# EAGLE board JKW_standalone (EAGLE 6.4), part 1 of 2
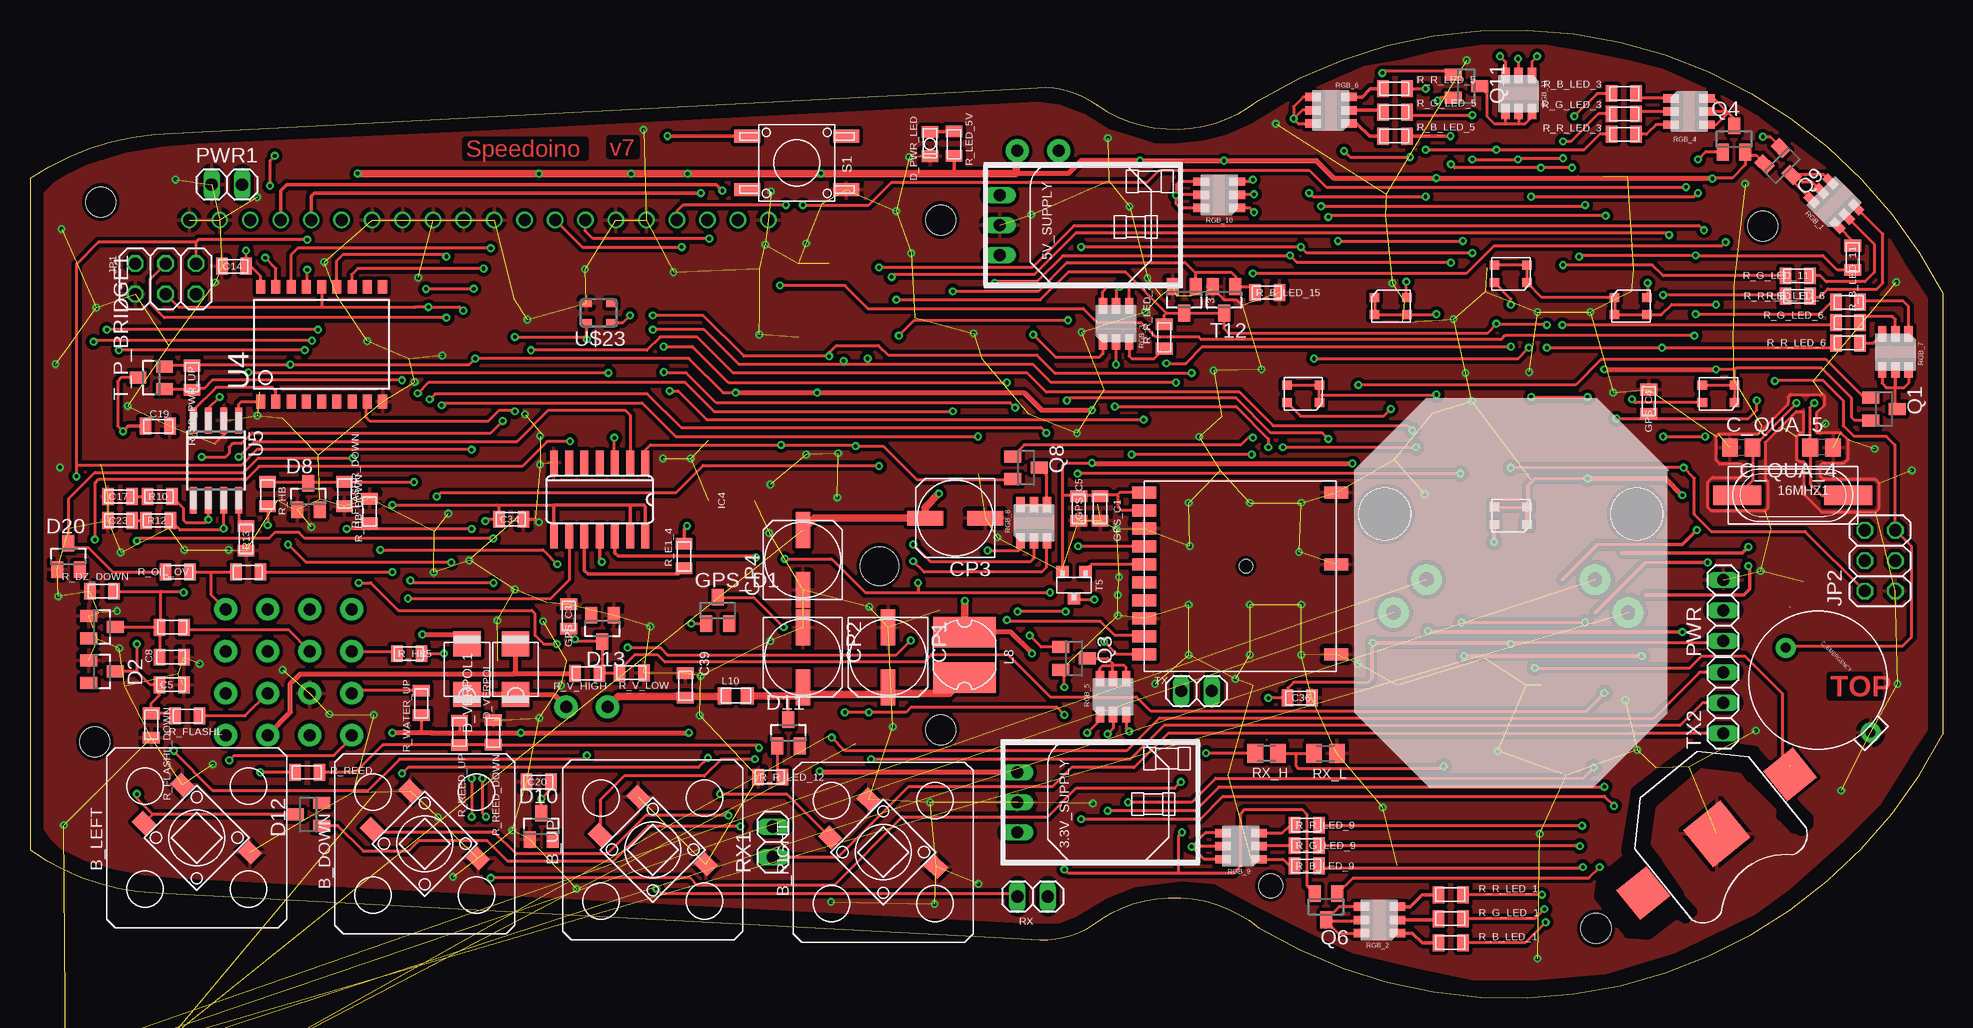
[diagram p0: board, top side]
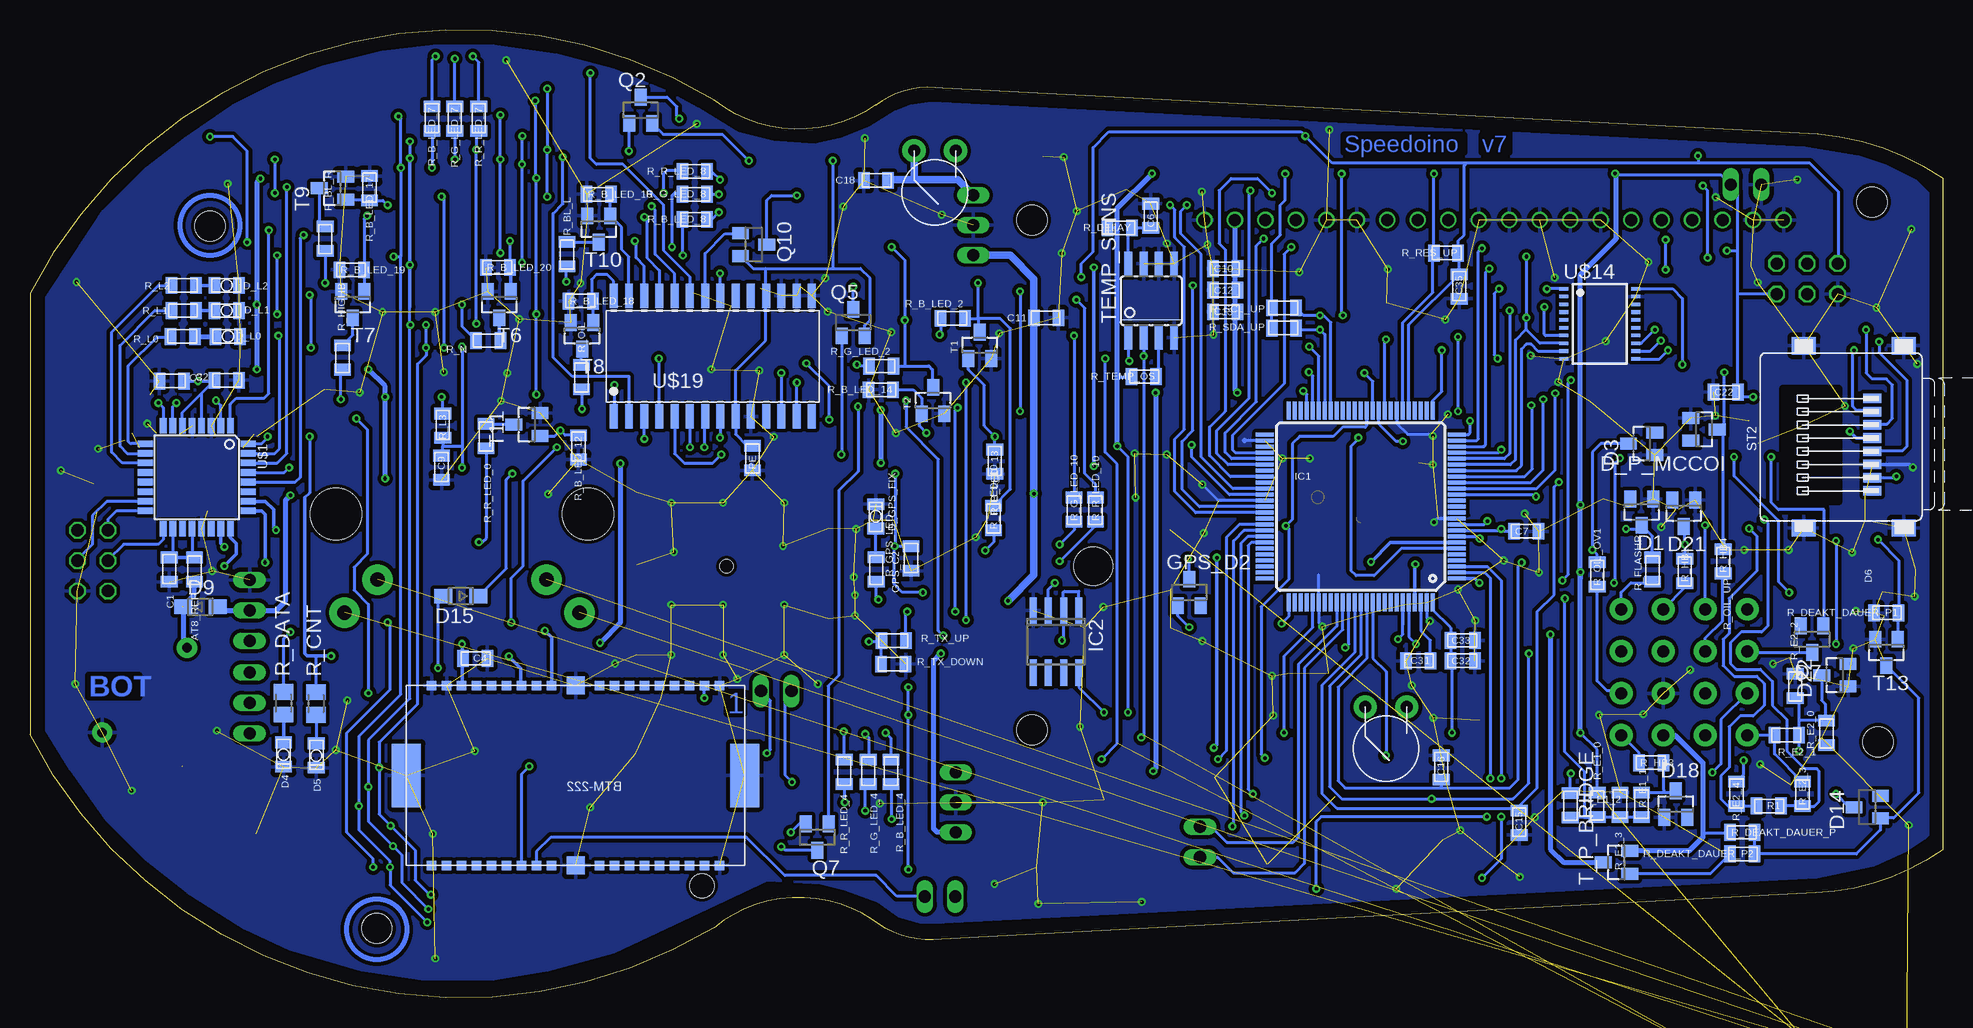
[diagram p1: board, bottom side, seen from below]

Size 159.4 x 80.69 mm. Coordinates in mm from the lower left corner, seen from the top.
Outline: 10.4,71.98 83.35,75.83
Outline: 10.41,71.98 arc29 0,68.34 0,12.34 arc33 10.6,8.74
Outline: 10.59,8.74 83.46,4.88
Outline: 83.32,75.82 arc-45 88.97,74.39
Outline: 88.91,74.44 arc73 102.4,74.84 arc-94 159.4,58.74 159.4,21.94 arc-94 102.4,5.84 arc73 89.17,6.5
Outline: 83.45,4.87 arc45 89.18,6.51
Copper layers (1*16): Top 0.035mm / dielectric 1.5mm / Bottom 0.035mm
Design rules "default": minimum track width 0.18mm, minimum drill 0.3mm, track to track 0.15mm, track to pad 0.15mm, pad to pad 0.15mm, via to via 0.15mm, smd to smd 0mil, copper to edge 0.1981mm, drill to drill 0.1981mm, minimum pad ring 0.18mm, minimum via ring 0.18mm, stop-mask expansion 0mil, vias tented up to drill 25mil, thermal gap 15mil
Net classes: 0 default: width 0.18 mm, drill 0.3 mm, clearance 0.15 mm
Holes 2.5 mm at 5.4,21.34 5.9,66.34 130.5,5.78 144.4,64.34
Holes 2 mm at 103.4,9.34
Holes 3.2 mm at 70.8,35.99
tKeepout: area 69.1,34.3 to 72.5,37.7; area 1.9,17.8 to 8.9,24.8; area 3.4,63.9 to 8.4,68.9
bKeepout: area 69.1,34.3 to 72.5,37.7
tRestrict: area 146,14 to 148.1,16; area 136.8,6.7 to 138.4,8.4; area 143.8,15.9 to 146.1,18.6; area 130.8,5.3 to 137.1,11.8; area 133,10.9 to 144.7,21.2; area 134.5,8.2 to 137.4,11.3

## Footprints (pad centres in the part's own frame; a part is rotated, then mirrored left to right if it is on the bottom)
OKI-78SR = drill 1 long: GND 0,-6.95; IN 2.5,-6.95; OUT -2.5,-6.95
POLY_FUSE = drill 1 pad 1.93: P$1 -1.73,0; P$2 1.73,0
XT-HC49S-SMD = smd 4 x 1.6: 1 -4.617,0; 2 4.617,0
0805 = smd 0.965 x 1.397: 1 -1.016,0; 2 1.016,0
SMD_DRUCKTASTER = smd 1.55 x 1.3 rotated 45: IN 1.22,4.402; IN2 -4.402,-1.22; OUT -1.22,-4.402
BTM-222 = smd 0.8 x 0.8: P$1 -12.635,-7.5; P$2 -11.385,-7.5; P$3 -10.135,-7.5; P$4 -8.885,-7.5; P$5 -7.635,-7.5; P$6 -6.385,-7.5; P$7 -5.135,-7.5; P$8 -3.885,-7.5; P$9 -2.635,-7.5; P$11 1.365,-7.5; P$12 2.615,-7.5; P$13 3.865,-7.5; P$14 5.115,-7.5; P$15 6.365,-7.5; P$16 7.615,-7.5; P$17 8.865,-7.5; P$18 10.115,-7.5; P$19 11.365,-7.5; P$20 11.365,7.5; P$21 10.115,7.5; P$22 8.865,7.5; P$23 7.615,7.5; P$24 6.365,7.5; P$25 5.115,7.5; P$26 3.865,7.5; P$27 2.615,7.5; P$28 1.365,7.5; P$30 -2.635,7.5; P$31 -3.885,7.5; P$32 -5.135,7.5; P$33 -6.385,7.5; P$34 -7.635,7.5; P$35 -8.885,7.5; P$36 -10.135,7.5; P$37 -11.385,7.5; P$38 -12.635,7.5 | smd 1.5 x 1.5: P$10 -0.635,-7.5; P$29 -0.635,7.5 | smd 2.4 x 5.3: P$AGND -14.735,0; P$BGND 13.465,0
GOLDCAP = drill 0.8 pad 1.676: MINUS -6.2,0; PLUS 3.8,0
C0805 = smd 1.3 x 1.5: 1 -0.95,0; 2 0.95,0
SMD/SMT_6.6/6.6 = smd 3 x 1.2: NEG -2.5,0; POS 2.5,0
SOT23 = smd 1 x 1.4: 1 -0.95,-1.1; 2 0.95,-1.1; 3 0,1.1
LED-0805 = smd 0.965 x 1.397: 1 -1.016,0; 2 1.016,0
SOD323-W = smd 1.5 x 1.2: A 1.45,0; C -1.45,0
PLCC-4 = smd 0.8 x 0.75: P$1 -1.35,0.725; P$2 -1.35,-0.725; P$3 1.35,-0.725; P$4 1.35,0.725
SMB = smd 2.1 x 2.3: A -2.114,0; K 2.114,0
MT3329 = smd 2 x 1: 3D-FIX -8.5,0.15; D+ -8.5,-1.35; D- -8.5,-2.85; EN -8.5,4.65; GND -8.5,3.15; GND2 -8.5,-4.35; GND_3 7.5,6.15; GND_4 7.5,0.15; GND_5 7.5,-7.35; RXD -8.5,-7.35; TXD -8.5,-5.85; VBACKUP -8.5,1.65; VCC -8.5,6.15 | hole 1.1: 0,0
BATTCON_12MM = smd 3.962 x 3.962: GND 0,0 | smd 3.175 x 3.175: PWR@1 -7.874,0; PWR@2 7.874,0
SO14 = smd 0.66 x 2.032: 1 -3.81,-3.073; 2 -2.54,-3.073; 3 -1.27,-3.073; 4 0,-3.073; 5 1.27,-3.073; 6 2.54,-3.073; 7 3.81,-3.073; 8 3.81,3.073; 9 2.54,3.073; 10 1.27,3.073; 11 0,3.073; 12 -1.27,3.073; 13 -2.54,3.073; 14 -3.81,3.073
SO08 = smd 0.6 x 2.2: 1 -1.905,-2.6; 2 -0.635,-2.6; 3 0.635,-2.6; 4 1.905,-2.6; 5 1.905,2.6; 6 0.635,2.6; 7 -0.635,2.6; 8 -1.905,2.6
SOIC20 = smd 0.66 x 2.032: 1 -5.715,-5.029; 2 -4.445,-5.029; 3 -3.175,-5.029; 4 -1.905,-5.029; 5 -0.635,-5.029; 6 0.635,-5.029; 7 1.905,-5.029; 8 3.175,-5.029; 9 4.445,-5.029; 10 5.715,-5.029; 11 5.715,5.029; 12 4.445,5.029; 13 3.175,5.029; 14 1.905,5.029; 15 0.635,5.029; 16 -0.635,5.029; 17 -1.905,5.029; 18 -3.175,5.029; 19 -4.445,5.029; 20 -5.715,5.029
TQFP100 = smd 1.5 x 0.35: 1 -8,6; 2 -8,5.5; 3 -8,5; 4 -8,4.5; 5 -8,4; 6 -8,3.5; 7 -8,3; 8 -8,2.5; 9 -8,2; 10 -8,1.5; 11 -8,1; 12 -8,0.5; 13 -8,0; 14 -8,-0.5; 15 -8,-1; 16 -8,-1.5; 17 -8,-2; 18 -8,-2.5; 19 -8,-3; 20 -8,-3.5; 21 -8,-4; 22 -8,-4.5; 23 -8,-5; 24 -8,-5.5; 25 -8,-6; 51 8,-6; 52 8,-5.5; 53 8,-5; 54 8,-4.5; 55 8,-4; 56 8,-3.5; 57 8,-3; 58 8,-2.5; 59 8,-2; 60 8,-1.5; 61 8,-1; 62 8,-0.5; 63 8,0; 64 8,0.5; 65 8,1; 66 8,1.5; 67 8,2; 68 8,2.5; 69 8,3; 70 8,3.5; 71 8,4; 72 8,4.5; 73 8,5; 74 8,5.5; 75 8,6 | smd 0.35 x 1.5: 26 -6,-8; 27 -5.5,-8; 28 -5,-8; 29 -4.5,-8; 30 -4,-8; 31 -3.5,-8; 32 -3,-8; 33 -2.5,-8; 34 -2,-8; 35 -1.5,-8; 36 -1,-8; 37 -0.5,-8; 38 0,-8; 39 0.5,-8; 40 1,-8; 41 1.5,-8; 42 2,-8; 43 2.5,-8; 44 3,-8; 45 3.5,-8; 46 4,-8; 47 4.5,-8; 48 5,-8; 49 5.5,-8; 50 6,-8; 76 6,8; 77 5.5,8; 78 5,8; 79 4.5,8; 80 4,8; 81 3.5,8; 82 3,8; 83 2.5,8; 84 2,8; 85 1.5,8; 86 1,8; 87 0.5,8; 88 0,8; 89 -0.5,8; 90 -1,8; 91 -1.5,8; 92 -2,8; 93 -2.5,8; 94 -3,8; 95 -3.5,8; 96 -4,8; 97 -4.5,8; 98 -5,8; 99 -5.5,8; 100 -6,8
2X03 = drill 1.016 octagon: 1 -2.54,-1.27; 2 -2.54,1.27; 3 0,-1.27; 4 0,1.27; 5 2.54,-1.27; 6 2.54,1.27
L-PD54 = smd 2.54 x 5.2: 1 -1.905,0; 2 1.905,0
0805+603 = smd 1.11 x 1.43: 1 -0.953,0; 2 0.953,0
NHD_2.7_SOLO_RO = drill 1: CS -102.51,24.5; DC -69.49,24.5; GND0 -61.87,24.5; GND1 -72.03,24.5; GND2 -74.57,24.5; GND3 -84.73,24.5; GND4 -87.27,24.5; GND5 -89.81,24.5; GND6 -92.35,24.5; GND7 -94.89,24.5; GND8 -107.59,24.5; GND9 -110.13,24.5; NC0 -66.95,24.5; NC1 -82.19,24.5; NC2 -97.43,24.5; NC3 -105.05,24.5; RES -99.97,24.5; SCLK -77.11,24.5; SDIN -79.65,24.5; VDD0 -64.41,24.5 | hole 2.5: -47.5,-18; -47.5,24.5
1X03 = drill 1.016 long: 1 -2.54,0; 2 0,0; 3 2.54,0
1X02 = drill 1.016 long: 1 -1.27,0; 2 1.27,0
M0805 = smd 1.3 x 1.6: 1 -0.95,0; 2 0.95,0
PLCC-6 = smd 1.3 x 0.7: 1+ 0,2.75; 1- 3,2.75; 2+ 0,1.65; 2- 3,1.65; 3+ 0,0.55; 3- 3,0.55
SW-ECO = smd 2.184 x 1.067: 1 -4.128,2.223; 2 -4.128,-2.223; 3 4.128,2.223; 4 4.128,-2.223
SPEEDOSTECKER = drill 1 pad 1.9: P$1 -2,5.5; P$2 -5.5,5.5; P$3 1.5,5.5; P$4 5,5.5; P$5 5,2; P$6 1.5,2; P$7 -2,2; P$8 -5.5,2; P$9 -5.5,-1.5; P$10 -2,-1.5; P$11 1.5,-1.5; P$12 5,-1.5; P$13 5,-5; P$14 1.5,-5; P$15 -2,-5; P$16 -5.5,-5
SD_MICRO = smd 0.8 x 1.5: 1 3.2,-9.35; 2 2.1,-9.35; 3 1,-9.35; 4 -0.1,-9.35; 5 -1.2,-9.35; 6 -2.3,-9.35; 7 -3.4,-9.35; 8 -4.5,-9.35 | smd 1.45 x 2: GND 7.6,-11.95; GND2 7.6,-3.65; GND3 -7.6,-11.95; GND4 -7.6,-3.65
STEPPER = drill 1.2 pad 2.54: 1+ 5.47,7.03; 1- 8.23,9.785; 2+ 8.23,-9.785; 2- 5.47,-7.03 | hole 4.3: 0,10.5; 0,-10.5
SOT-23 = smd 1.016 x 1.016: 1 0.953,1.111; 2 -0.952,1.111; 3 0,-1.111
SOIC8 = smd 0.66 x 2.032: 1 -1.975,-3.143; 2 -0.705,-3.143; 3 0.565,-3.143; 4 1.835,-3.143; 5 1.835,3.003; 6 0.565,3.003; 7 -0.705,3.003; 8 -1.975,3.003
SO-18W = smd 0.762 x 1.143: 1 -5.08,-4.788; 2 -3.81,-4.788; 3 -2.54,-4.788; 4 -1.27,-4.788; 5 0,-4.788; 6 1.27,-4.788; 7 2.54,-4.788; 8 3.81,-4.788; 9 5.08,-4.788; 10 5.08,4.788; 11 3.81,4.788; 12 2.54,4.788; 13 1.27,4.788; 14 0,4.788; 15 -1.27,4.788; 16 -2.54,4.788; 17 -3.81,4.788; 18 -5.08,4.788
SO-08M = smd 0.6 x 2.2: 1 -1.905,-3.33; 2 -0.635,-3.33; 3 0.635,-3.33; 4 1.905,-3.33; 5 1.905,3.33; 6 0.635,3.33; 7 -0.635,3.33; 8 -1.905,3.33
TQFP8 = smd 1.27 x 0.559: 1 -4.293,2.8; 2 -4.293,2; 3 -4.293,1.2; 4 -4.293,0.4; 5 -4.293,-0.4; 6 -4.293,-1.2; 7 -4.293,-2; 8 -4.293,-2.8; 17 4.293,-2.8; 18 4.293,-2; 19 4.293,-1.2; 20 4.293,-0.4; 21 4.293,0.4; 22 4.293,1.2; 23 4.293,2; 24 4.293,2.8 | smd 0.559 x 1.27: 9 -2.8,-4.293; 10 -2,-4.293; 11 -1.2,-4.293; 12 -0.4,-4.293; 13 0.4,-4.293; 14 1.2,-4.293; 15 2,-4.293; 16 2.8,-4.293; 25 2.8,4.293; 26 2,4.293; 27 1.2,4.293; 28 0.4,4.293; 29 -0.4,4.293; 30 -1.2,4.293; 31 -2,4.293; 32 -2.8,4.293
TSSOP20 = smd 0.3 x 0.75: 1 -2.925,-3; 2 -2.275,-3; 3 -1.625,-3; 4 -0.975,-3; 5 -0.325,-3; 6 0.325,-3; 7 0.975,-3; 8 1.625,-3; 9 2.275,-3; 10 2.925,-3; 11 2.925,3; 12 2.275,3; 13 1.625,3; 14 0.975,3; 15 0.325,3; 16 -0.325,3; 17 -0.975,3; 18 -1.625,3; 19 -2.275,3; 20 -2.925,3
SOIC28 = smd 0.66 x 2.032: 1 -8.255,-5.029; 2 -6.985,-5.029; 3 -5.715,-5.029; 4 -4.445,-5.029; 5 -3.175,-5.029; 6 -1.905,-5.029; 7 -0.635,-5.029; 8 0.635,-5.029; 9 1.905,-5.029; 10 3.175,-5.029; 11 4.445,-5.029; 12 5.715,-5.029; 13 6.985,-5.029; 14 8.255,-5.029; 15 8.255,5.029; 16 6.985,5.029; 17 5.715,5.029; 18 4.445,5.029; 19 3.175,5.029; 20 1.905,5.029; 21 0.635,5.029; 22 -0.635,5.029; 23 -1.905,5.029; 24 -3.175,5.029; 25 -4.445,5.029; 26 -5.715,5.029; 27 -6.985,5.029; 28 -8.255,5.029
ASE = smd 0.9 x 0.65: 1 -1.05,-0.825; 2 1.05,-0.825; 3 1.05,0.825; 4 -1.05,0.825

## Placement (x,y rotation side)
3.3V_SUPPLY  OKI78SR3.31.5WHC  [OKI-78SR]  89.2,16.29 270 top
5V_F  600mA  [POLY_FUSE]  84,70.62 180 bottom
5V_SUPPLY  OKI78SR51.5W36HC  [OKI-78SR]  87.75,64.42 270 top
12V_F1  1.1A  [POLY_FUSE]  46.4,24.24 180 bottom
16MHZ1  16Mhz  [XT-HC49S-SMD]  146.9,41.89 0 top
AT8_REF  10R  [0805]  145.7,35.69 90 bottom
B_DOWN  SMD_TASTER_MIT_KAPPE  [SMD_DRUCKTASTER]  32.9,12.84 270 top
B_LEFT  SMD_TASTER_MIT_KAPPE  [SMD_DRUCKTASTER]  13.9,13.34 270 top
B_RIGHT  SMD_TASTER_MIT_KAPPE  [SMD_DRUCKTASTER]  71.1,12.14 270 top
B_UP  SMD_TASTER_MIT_KAPPE  [SMD_DRUCKTASTER]  51.9,12.34 270 top
BLUETOOTH  BTM-222  [BTM-222]  114.57,18.53 180 bottom
C1  100nF  [0805]  147.8,35.69 270 bottom
C2  100nF  [0805]  147.6,51.42 0 bottom
C3  100nF  [0805]  143,51.48 180 bottom
C4  100nF  [0805]  122.3,28.29 180 bottom
C5  100nF  [0805]  11.8,26.09 0 top
C6  10µF  [0805]  66,65.19 90 bottom
C7  100nF  [0805]  34.7,38.89 0 bottom
C8  100nF  [0805]  11.8,28.39 0 top
C9  100nF  [0805]  125.1,44.19 270 bottom
C10  100nF  [0805]  59.8,60.79 0 bottom
C11  100n/20V  [0805]  74.72,56.69 0 bottom
C12  100nF  [0805]  59.8,58.99 0 bottom
C13  100nF  [0805]  59.8,57.19 0 bottom
C14  100n/20V  [0805]  17,60.99 0 top
C15  100nF  [0805]  35.3,14.59 270 bottom
C16  100nF  [0805]  41.8,19.19 270 bottom
C17  560p/20V  [0805]  7.5,41.79 0 top
C18  100n/20V  [0805]  88.9,68.14 180 bottom
C19  100nF  [0805]  10.64,47.66 180 top
C20  100nF  [0805]  42.4,17.99 0 top
C22  100n/20V  [0805]  18.1,50.49 0 bottom
C23  560p/20V  [0805]  7.5,39.79 0 top
C31  100nF  [0805]  43.7,28.09 180 bottom
C32  100nF  [0805]  40,28.09 0 bottom
C33  100nF  [0805]  40,29.79 0 bottom
C34  100nF  [0805]  40.1,39.89 0 top
C35  100nF  [0805]  40.3,59.29 270 bottom
C36  100nF  [0805]  105.8,24.99 180 top
C39  2µ2/100V  [0805]  54.61,26.04 90 top
C_EMERGENCY  DX-5R5H334U  [GOLDCAP]  149,26.49 135 top
C_QUA_1  Tantal 1µF  [C0805]  -1.6,-19.31 0 top  (outside the outline)
C_QUA_2  100nF  [C0805]  -1.6,-25.41 0 top  (outside the outline)
C_QUA_4  22pF  [C0805]  149.3,45.89 180 top
C_QUA_5  22pF  [C0805]  142.6,45.89 0 top
C_QUA_6  220nF  [C0805]  -1.6,-39.31 0 top  (outside the outline)
C_QUA_7  220nF  [C0805]  -1.6,-45.41 0 top  (outside the outline)
C_QUA_8  100nF  [C0805]  -1.6,-51.51 0 top  (outside the outline)
C_QUA_9  Tantal 100µF  [C0805]  -1.6,-57.61 0 top  (outside the outline)
CP1  330µF/16V  [SMD/SMT_6.6/6.6]  71.5,28.39 270 top
CP2  330µF/16V  [SMD/SMT_6.6/6.6]  64.4,28.39 270 top
CP3  330µF/16V  [SMD/SMT_6.6/6.6]  77.1,39.99 180 top
CP4  330µF/16V  [SMD/SMT_6.6/6.6]  64.4,36.49 90 top
D1  5.5V  [SOT23]  25.1,40.49 180 bottom
D2  5.5V  [SOT23]  6,27.19 270 top
D3  5.5V  [SOT23]  25.1,46.19 90 bottom
D4  Red  [LED-0805]  138.27,20.27 270 bottom
D5  Blue  [LED-0805]  135.54,20.19 270 bottom
D6  20V-Zdiode  [SOT23]  6,30.9 270 top
D7  771-PMBD7000235  [SOT23]  10.9,29.89 180 bottom
D8  5.5V  [SOT23]  23.2,41.79 0 top
D9  Mouser 726-BAT60AE6327  [SOD323-W]  145.2,32.59 0 bottom
D10  5.5V  [SOT23]  42.6,14.29 0 top
D11  20V-Zdiode  [SOT23]  63.2,22.09 0 top
D12  771-PMBD7000235  [SOT23]  23.2,15.29 90 top
D13  5.5V  [SOT23]  47.7,30.79 180 top
D14  771-PMBD7000235  [SOT23]  6.3,15.89 90 bottom
D15  Mouser 726-BAT60AE6327  [SOD323-W]  123.5,33.49 180 bottom
D18  78-MMBZ5232B-V  [SOT23]  22.25,16.14 0 bottom
D20  5.5V  [SOT23]  3.2,36.79 0 top
D21  5.5V  [SOT23]  21.6,40.39 180 bottom
D22  5.5V  [SOT23]  9,26.89 90 bottom
D_GPS_FIX  Red  [LED-0805]  88.92,40.14 90 bottom
D_GR_BLR  PLCC4_LED  [PLCC-4]  133.4,57.66 0 top
D_GR_N  PLCC4_LED  [PLCC-4]  123.4,60.34 180 top
D_L0  [LED-0805]  142.91,55.13 0 bottom
D_L1  [LED-0805]  143,57.29 0 bottom
D_L2  [LED-0805]  143,59.39 0 bottom
D_P_MCCOI  78-MMBZ5232B-V  [SOT23]  19.9,47.39 270 bottom
D_PWR_LED  Red  [LED-0805]  75,71.18 270 top
D_VERPOL  SS24T3G  [SMB]  40.45,27.39 270 top
D_VERPOL1  SS24T3G  [SMB]  36.4,27.39 270 top
GPS  MT3329  [MT3329]  101.35,35.99 0 top
GPS_BAT  F_908642  [BATTCON_12MM]  140.56,13.67 219 top
GPS_C1  100nF  [0805]  89.17,40.79 90 top
GPS_C2  100nF  [0805]  85.97,36.62 270 bottom
GPS_C3  100nF  [0805]  44.9,31.79 270 top
GPS_C4  100nF  [0805]  134.9,49.69 270 top
GPS_C5  100nF  [0805]  87.4,40.79 90 top
GPS_D1  771-BAV23C,215  [SOT23]  57.3,32.29 0 top
GPS_D2  771-BAV23C,215  [SOT23]  62.8,33.79 0 bottom
IC1  4093D  [SO14]  47.47,41.54 180 top
IC2  LM1458D  [SO08]  73.9,29.69 180 bottom
IC3  TMC222  [SOIC20]  4.9,-10.21 0 top  (outside the outline)
IC4  ATMEGA2560-16AU  [TQFP100]  48.5,40.95 180 bottom
JP1  ICSP  [2X03]  11.3,59.94 0 top
JP2  ICSP  [2X03]  154.18,36.44 90 top
L8  22µH 1A  [L-PD54]  77.88,28.59 90 top
L10  BLM21PG221SN1  [0805+603]  58.82,25.17 0 top
NHD_2.7  NHD_2.7_SOLO_RO  [NHD_2.7_SOLO_RO]  123.4,40.34 0 top
PE  100nF  [0805]  99.2,44.99 90 bottom
PWR  [1X03]  141.1,32.29 90 top
PWR1  [1X02]  16.4,67.79 0 top
Q1  BSS84  [SOT23]  154.5,49.09 270 top
Q2  BSS84  [SOT23]  108.5,73.99 0 bottom
Q3  BSS84  [SOT23]  87,28.29 270 top
Q4  BSS84  [SOT23]  142,71.59 0 top
Q5  BSS84  [SOT23]  90.8,56.29 0 bottom
Q6  BSS84  [SOT23]  108,7.59 180 top
Q7  BSS84  [SOT23]  93.8,13.39 180 bottom
Q8  BSS84  [SOT23]  83,44.19 270 top
Q9  BSS84  [SOT23]  146,69.39 225 top
Q10  BSS84  [SOT23]  99.1,62.79 270 bottom
Q11  BSS84  [SOT23]  119.7,75.99 270 top
R1  160  [0805]  14.5,15.99 180 bottom
R10  100  [0805]  10.8,41.79 0 top
R12  100  [0805]  10.7,39.79 0 top
R13  4.7k  [0805]  18,38.29 90 top
R_B_LED_1  80R  [0805]  118.4,4.59 0 top
R_B_LED_2  80R  [0805]  82.5,56.64 0 bottom
R_B_LED_3  80R  [0805]  132.8,75.39 180 top
R_B_LED_4  80R  [0805]  87.65,18.84 270 bottom
R_B_LED_5  80R  [0805]  113.75,71.84 0 top
R_B_LED_6  80R  [0805]  151.5,57.99 180 top
R_B_LED_7  80R  [0805]  125.9,73.29 270 bottom
R_B_LED_8  80R  [0805]  104,64.89 180 bottom
R_B_LED_9  80R  [0805]  106.4,10.99 0 top
R_B_LED_10  80R  [0805]  79.1,39.99 90 bottom
R_B_LED_11  80R  [0805]  151.9,61.69 270 top
R_B_LED_12  10k  [0805]  113.7,45.89 270 bottom
R_B_LED_13  10k  [0805]  79,44.69 270 bottom
R_B_LED_14  10k  [0805]  88.5,50.69 180 bottom
R_B_LED_15  10k  [0805]  103.1,58.79 0 top
R_B_LED_16  10k  [0805]  112,66.99 0 bottom
R_B_LED_17  10k  [0805]  131.1,67.49 270 bottom
R_B_LED_18  10k  [0805]  113.5,58.09 0 bottom
R_B_LED_19  10k  [0805]  132.6,60.69 0 bottom
R_B_LED_20  10k  [0805]  120.4,60.89 0 bottom
R_BL_L  33R  [0805]  114.65,61.99 90 bottom
R_BL_R  33R  [0805]  134.8,63.29 90 bottom
R_CNT  220R  [M0805]  135.56,24.53 90 bottom
R_DATA  220R  [M0805]  138.27,24.55 90 bottom
R_DEAKT_DAUER_P  10k  [0805]  16.7,13.79 0 bottom
R_DEAKT_DAUER_P1  10k  [0805]  4.7,32.09 180 bottom
R_DEAKT_DAUER_P2  5k  [0805]  16.7,11.99 180 bottom
R_DELAY  300R  [0805]  68.6,64.19 180 bottom
R_DZ  5k  [0805]  11.81,30.88 180 top
R_DZ_DOWN  3k3  [0805]  6,33.89 180 top
R_E1_0  n.b.  [0805]  28.8,16.09 90 bottom
R_E1_1  n.b. / 0R  [0805]  25.1,16.09 270 bottom
R_E1_2  n.b.  [0805]  31.04,16.04 90 bottom
R_E1_3  n.b. / 0R  [0805]  26.9,16.09 270 bottom
R_E1_4  n.b.  [0805]  54.5,36.84 90 top
R_E2_0  n.b.  [0805]  9.7,22.09 90 bottom
R_E2_1  n.b. / 0R  [0805]  13,21.89 0 bottom
R_E2_2  n.b.  [0805]  12.3,25.99 90 bottom
R_E2_3  0R / n.b.  [0805]  11.7,16.99 90 bottom
R_E2_4  0R / n.b.  [0805]  17.2,16.99 270 bottom
R_FLASHL  10k  [0805]  13.1,23.49 180 top
R_FLASHL_DOWN  5k  [0805]  10.1,22.69 270 top
R_FLASHR  10k  [0805]  24.2,35.69 90 bottom
R_FLASHR_DOWN  5k  [0805]  28.3,40.59 90 top
R_G_LED_1  110R  [0805]  118.4,6.59 0 top
R_G_LED_2  110R  [0805]  88.47,52.67 0 bottom
R_G_LED_3  110R  [0805]  132.8,73.69 180 top
R_G_LED_4  110R  [0805]  89.55,18.84 270 bottom
R_G_LED_5  110R  [0805]  113.75,73.84 0 top
R_G_LED_6  110R  [0805]  151.5,56.29 180 top
R_G_LED_7  110R  [0805]  124,73.29 270 bottom
R_G_LED_8  110R  [0805]  104,66.99 180 bottom
R_G_LED_9  110R  [0805]  106.4,12.69 0 top
R_G_LED_10  110R  [0805]  72.4,40.69 90 bottom
R_G_LED_11  110R  [0805]  147.3,60.19 180 top
R_GPS_LED  1k  [0805]  88.88,35.72 90 bottom
R_GR_BL_L  PLCC4_LED  [PLCC-4]  113.4,57.66 0 top
R_HB  10k  [0805]  19.8,41.99 90 top
R_HB1  600R  [0805]  21.5,35.59 90 bottom
R_HB3  600R  [0805]  24.3,19.59 0 bottom
R_HB4  600R  [0805]  18.3,36.39 90 bottom
R_HB5  600R  [0805]  31.6,28.69 0 top
R_HB_DOWN  5k  [0805]  26.2,41.99 270 top
R_HIGHB  46R  [0805]  133.35,53.39 90 bottom
R_L0  1k  [0805]  146.67,55.13 0 bottom
R_L1  1k  [0805]  146.6,57.29 0 bottom
R_L2  1k  [0805]  146.6,59.39 0 bottom
R_L3  10k  [0805]  125,47.69 270 bottom
R_LED_5V  2k  [0805]  77,71.22 90 top
R_N  33R  [0805]  121.2,54.79 0 bottom
R_OIL  52R  [0805]  113.45,51.74 90 bottom
R_OIL_OV  1k  [0805]  12.3,35.49 180 top
R_OIL_OV1  1k  [0805]  28.8,35.29 90 bottom
R_OIL_UP  220R  [0805]  18.2,35.49 0 top
R_R_LED_0  52R  [0805]  121.4,46.84 90 bottom
R_R_LED_1  92R  [0805]  118.4,8.59 0 top
R_R_LED_2  92R  [0805]  94.53,55.14 90 top
R_R_LED_3  92R  [0805]  132.8,71.99 180 top
R_R_LED_4  92R  [0805]  91.55,18.84 270 bottom
R_R_LED_5  92R  [0805]  113.75,75.79 0 top
R_R_LED_6  92R  [0805]  151.5,54.59 180 top
R_R_LED_7  92R  [0805]  122,73.29 270 bottom
R_R_LED_8  92R  [0805]  104,68.89 180 bottom
R_R_LED_9  92R  [0805]  106.4,14.39 0 top
R_R_LED_10  92R  [0805]  70.6,40.69 90 bottom
R_R_LED_11  92R  [0805]  147.3,58.49 180 top
R_R_LED_12  220R  [0805]  61.7,18.39 0 top
R_REED  7k  [0805]  23.1,18.79 0 top
R_REED_DOWN  5k / n.b. (12V Signal / 5V Signal)  [0805]  38.6,22.12 90 top
R_REED_UP  n.b.(Honda Signal) / 15k (Reed)  [0805]  35.8,22.09 270 top
R_RES_UP  10k  [0805]  41.4,62.09 180 bottom
R_SCL_UP  1k  [0805]  54.9,57.52 0 bottom
R_SD_PWR_UP  10k  [0805]  13.5,51.69 270 top
R_SDA_UP  1k  [0805]  54.9,55.84 0 bottom
R_TEMP_OS  10K  [0805]  66.6,51.79 180 bottom
R_TX_DOWN  2k7  [0805]  87.45,27.82 0 bottom
R_TX_UP  1k2  [0805]  87.42,29.77 0 bottom
R_V_HIGH  2k2  [0805]  46.45,27.04 0 top
R_V_LOW  1k  [0805]  50.15,27.09 0 top
R_WATER_UP  390R  [0805]  32.6,24.59 90 top
RGB_1  RGB_LED  [PLCC-6]  148.1,66.09 315 top
RGB_2  RGB_LED  [PLCC-6]  110.95,4.84 0 top
RGB_3  RGB_LED  [PLCC-6]  88.85,57.69 270 top
RGB_4  RGB_LED  [PLCC-6]  139.75,75.54 180 top
RGB_5  RGB_LED  [PLCC-6]  88.6,26.59 270 top
RGB_6  RGB_LED  [PLCC-6]  106.9,72.34 0 top
RGB_7  RGB_LED  [PLCC-6]  157.1,52.34 90 top
RGB_8  RGB_LED  [PLCC-6]  82,41.09 270 top
RGB_9  RGB_LED  [PLCC-6]  99.4,10.99 0 top
RGB_10  RGB_LED  [PLCC-6]  97.6,65.29 0 top
RGB_11  RGB_LED  [PLCC-6]  125.7,73.89 90 top
RX  [1X02]  83.56,8.44 0 top
RX1  [1X02]  61.9,12.99 90 top
RX_H  1k2  [M0805]  103.06,20.38 0 top
RX_L  2k7  [M0805]  107.95,20.38 180 top
S1  [SW-ECO]  63.91,69.6 180 top
SPEEDOSTECKER  SPEEDOSTECKER  [SPEEDOSTECKER]  21.8,26.89 0 top
ST2  SD_MICRO  [SD_MICRO]  15.22,46.76 90 bottom
STEPPER  STEPPER  [STEPPER]  123.4,40.34 270 top
T1  Mouser: 771-2N7002BK215 , N-Channel, 60V 350mA, SOT-23, 0,052€  [SOT23]  80.25,54.39 0 bottom
T2  Mouser: 771-2N7002BK215 , N-Channel, 60V 350mA, SOT-23, 0,052€  [SOT23]  84.15,49.79 0 bottom
T3  Mouser: 771-2N7002BK215 , N-Channel, 60V 350mA, SOT-23, 0,052€  [SOT23]  96.17,58.19 180 top
T5  Mouser: 771-2N7002BK215 , N-Channel, 60V 350mA, SOT-23, 0,052€  [SOT-23]  87,34.39 0 top
T6  Mouser: 771-2N7002BK215 , N-Channel, 60V 350mA, SOT-23, 0,052€  [SOT23]  120.3,57.79 180 bottom
T7  Mouser: 771-2N7002BK215 , N-Channel, 60V 350mA, SOT-23, 0,052€  [SOT23]  132.5,57.79 180 bottom
T8  Mouser: 771-2N7002BK215 , N-Channel, 60V 350mA, SOT-23, 0,052€  [SOT23]  113.4,55.19 180 bottom
T9  Mouser: 771-2N7002BK215 , N-Channel, 60V 350mA, SOT-23, 0,052€  [SOT23]  134.2,67.49 90 bottom
T10  Mouser: 771-2N7002BK215 , N-Channel, 60V 350mA, SOT-23, 0,052€  [SOT23]  112,64.09 180 bottom
T11  Mouser: 771-2N7002BK215 , N-Channel, 60V 350mA, SOT-23, 0,052€  [SOT23]  118,47.79 90 bottom
T12  Mouser: 771-2N7002BK215 , N-Channel, 60V 350mA, SOT-23, 0,052€  [SOT23]  99.5,58.19 180 top
T13  Mouser: 771-2N7002BK215 , N-Channel, 60V 350mA, SOT-23, 0,052€  [SOT23]  4.7,28.79 180 bottom
T_P_BRIDGE  PMV160UP215  [SOT23]  27.2,11.29 90 bottom
T_P_BRIDGE1  PMV160UP215  [SOT23]  10.1,51.69 90 top
TEMP_SENS  SE95D  [SOIC8]  65.9,58.19 0 bottom
TX  [1X02]  97.22,25.57 180 top
TX2  [1X03]  141.1,24.59 90 top
U4  MCP2515  [SO-18W]  24.3,54.49 0 top
U5  MCP2551  [SO-08M]  15.5,44.79 180 top
U$1  ATMEGA328P-AU  [TQFP8]  145.5,43.39 270 bottom
U$3  CLM4B-BKW-CTBVA363  [PLCC-4]  140.7,50.34 180 top
U$11  CLM4B-RKW-CWAXBAA3  [PLCC-4]  106.1,50.34 180 top
U$14  74LVC_LVCH245A  [TSSOP20]  28.6,56.19 270 bottom
U$19  MCP23017  [SOIC28]  102.5,53.49 0 bottom
U$22  CLM4B-RKW-CWAXBAA3  [PLCC-4]  123.4,40.19 180 top
U$23  ASE  [ASE]  47.4,57.09 180 top

## Library data of the parts
3.3V_SUPPLY 5V_F 5V_SUPPLY 12V_F1 B_DOWN B_LEFT B_RIGHT B_UP C_EMERGENCY CP1-CP4 D_GR_BLR D_GR_N GPS NHD_2.7 R_GR_BL_L RGB_1-RGB_11 SPEEDOSTECKER ST2 STEPPER T1-T3 T6-T13 T_P_BRIDGE T_P_BRIDGE1 TEMP_SENS U$1 U$3 U$11 U$14 U$19 U$22 = Kolja
16MHZ1 = XT
AT8_REF C1-C20 C22 C23 C31-C36 C39 D_VERPOL D_VERPOL1 GPS_C1-GPS_C5 L8 L10 PE R1 R10 R12 R13 R_B_LED_1-R_B_LED_20 R_BL_L R_BL_R R_DEAKT_DAUER_P R_DEAKT_DAUER_P1 R_DEAKT_DAUER_P2 R_DELAY R_DZ R_DZ_DOWN R_E1_0 R_E1_1-R_E1_4 R_E2_0 R_E2_1-R_E2_4 R_FLASHL R_FLASHL_DOWN R_FLASHR R_FLASHR_DOWN R_G_LED_1-R_G_LED_11 R_GPS_LED R_HB R_HB1 R_HB3-R_HB5 R_HB_DOWN R_HIGHB R_L0 R_L1-R_L3 R_LED_5V R_N R_OIL R_OIL_OV R_OIL_OV1 R_OIL_UP R_R_LED_0 R_R_LED_1-R_R_LED_12 R_REED R_REED_DOWN R_REED_UP R_RES_UP R_SCL_UP R_SD_PWR_UP R_SDA_UP R_TEMP_OS R_TX_DOWN R_TX_UP R_V_HIGH R_V_LOW R_WATER_UP T5 = RCLDT
BLUETOOTH = btm-222
C_QUA_1 C_QUA_2 C_QUA_4-C_QUA_9 R_CNT R_DATA = rcl
D1-D3 D6 D8-D11 D13 D15 D18 D20-D22 D_P_MCCOI = diode
D4 D5 D_GPS_FIX D_L0 D_L1 D_L2 D_PWR_LED = OPTO
D7 D12 D14 GPS_D1 GPS_D2 = semicon-smd-ipc
GPS_BAT = SparkFun
IC1 = 40xx
IC2 = linear
IC3 = tmc
IC4 = atmel-2005
JP1 JP2 PWR PWR1 RX RX1 TX TX2 = pinhead
Q1-Q11 = transistor-small-signal
RX_H RX_L = resistor
S1 = SWITCH+RELAIS
U4 = microchip_can
U5 = skpang_lib
U$23 = crystal; OC_FARNELL: unknown; OC_NEWARK: unknown

## Nets
3D-FIX: GPS.3D-FIX T5.1
12V: D_VERPOL.A R_V_HIGH.1 SPEEDOSTECKER.P$15
12V_D_SAFE: 12V_F1.P$1 D_VERPOL1.K D_VERPOL.K
12V_PERMANENT: R_DEAKT_DAUER_P.1 SPEEDOSTECKER.P$14 T_P_BRIDGE.2
12V_SAFE: 12V_F1.P$2 C39.1 L10.1
16MHZ: IC4.34 U4.8 U$23.3
+3V3_EXT: 3.3V_SUPPLY.OUT BLUETOOTH.P$2 BLUETOOTH.P$17 C4.2 C10.2 C12.2 C13.2 C36.2 GPS.EN GPS.VCC GPS_C1.2 GPS_C5.2 NHD_2.7.VDD0 PWR.1 R_SD_PWR_UP.1 T5.2 T_P_BRIDGE1.2 U$14.1 U$14.20
+3V3_EXT_S: C19.2 ST2.4 T_P_BRIDGE1.3
A0: D3.3 IC4.97 R_OIL_OV1.2
A1: D20.3 IC4.96 R_OIL_OV.2
A2: D13.3 GPS_C3.2 GPS_C4.2 IC4.95 R_V_HIGH.2 R_V_LOW.1 U$1.2
A3: IC4.94
A4: IC4.93
A5: IC4.92
A6: IC4.91
A7: D22.3 IC4.90 R_E2_0.2 R_E2_1.2 R_E2_2.1
A11: IC2.1 IC2.2 IC4.86
A12: IC4.85 RX1.1 TX2.1
A13: IC4.84 RX1.2
A14: IC4.83
A15: IC4.82
ANT: BLUETOOTH.P$37
ARD_RES_OUT: C35.1 IC4.30 JP1.2 R_RES_UP.1 S1.4 U4.17 U$1.28
ARD_RX_5: RX_H.1 TX.1
ARD_RX_33: BLUETOOTH.P$26 RX_H.2 RX_L.2
B_DOWN: B_DOWN.OUT IC4.68
B_LEFT: B_LEFT.OUT D12.3 D14.3
B_RIGHT: B_RIGHT.OUT IC4.69
B_UP: B_UP.OUT IC4.66
BAT+: 3.3V_SUPPLY.IN 5V_SUPPLY.IN C11.1 C_QUA_7.1 C_QUA_8.1 C_QUA_9.1 CP3.POS CP4.POS IC3.12 IC3.19 L8.2
BL_L_IN: C5.1 D2.3 IC4.8 R_FLASHL.2 R_FLASHL_DOWN.1
BL_L_IN_H: R_FLASHL.1 SPEEDOSTECKER.P$10
BL_R_IN: C7.1 D1.3 IC4.9 R_FLASHR.2 R_FLASHR_DOWN.1
BL_R_IN_H: R_FLASHR.1 SPEEDOSTECKER.P$4
BLUE_INSTR: R_B_LED_1.2 R_B_LED_2.2 R_B_LED_3.2 R_B_LED_4.2 R_B_LED_5.2 R_B_LED_6.2 R_B_LED_7.2 R_B_LED_8.2 R_B_LED_9.2 R_B_LED_10.2 R_B_LED_11.2 T1.3
CAN_RXD: U4.2 U5.4
CAN_TXD: U4.1 U5.1
CANH: R1.2 R12.2 R_E2_4.2 U5.7
CANL: R1.1 R10.2 R_E2_3.1 U5.6
CONNECT: BLUETOOTH.P$13 R_CNT.2 U$1.32
D2: IC1.3 IC4.6
D3: IC1.11 IC4.7
D4: IC4.1 R_SD_PWR_UP.2 T_P_BRIDGE1.1
D5: IC4.5
D6: IC4.15 U$1.1
D7: IC4.16 R_B_LED_15.1 T3.1 T12.1
D8: IC4.17 R_B_LED_14.1 T2.1
D9: IC4.18 R_B_LED_13.1 T1.1
D10: IC4.23 U4.12
D11: IC4.24 U4.16
D12: D7.1 IC4.25
D13: IC4.26 R_B_LED_12.1 T11.1
D22: IC4.78
D23: IC4.77
D24: GPS_D1.1 IC4.76
D25: IC4.75
D26: IC4.74
D27: IC4.73
D28: IC4.72
D29: IC4.71
D30: IC4.60 NHD_2.7.DC
D31: IC4.59
D32: IC4.58 NHD_2.7.RES
D33: IC4.57
D34: IC4.56 NHD_2.7.CS
D36: IC4.54 NHD_2.7.SDIN
D38: IC4.50
D39: IC4.70
D42: IC4.42
D43: IC4.41
D44: IC4.40
D45: IC4.39
D46: IC4.38
D47: IC4.37 R_E1_2.2 R_E1_4.2
D48: D_P_MCCOI.3 IC4.36 R_HB4.2
D50: IC4.22 JP1.6 ST2.7 U4.15
D51: IC4.21 JP1.3 U4.14 U$14.7
D52: IC4.20 JP1.4 U4.13 U$14.8
D53: IC4.19 U$14.9
DISP_SCL: IC4.55 NHD_2.7.SCLK
DZ: C8.1 D6.3 IC1.2 R_DZ.2 R_DZ_DOWN.1
DZ_IN: R_DZ.1 SPEEDOSTECKER.P$6
GND: 3.3V_SUPPLY.GND 5V_SUPPLY.GND B_DOWN.IN B_DOWN.IN2 B_LEFT.IN B_LEFT.IN2 B_RIGHT.IN B_RIGHT.IN2 B_UP.IN B_UP.IN2 BLUETOOTH.P$1 BLUETOOTH.P$10 BLUETOOTH.P$18 BLUETOOTH.P$19 BLUETOOTH.P$29 BLUETOOTH.P$38 BLUETOOTH.P$AGND BLUETOOTH.P$BGND C1.2 C2.1 C3.1 C4.1 C5.2 C6.2 C7.2 C8.2 C9.2 C10.1 C11.2 C12.1 C13.1 C14.1 C15.2 C16.1 C17.1 C18.2 C19.1 C20.1 C22.1 C23.1 C31.2 C32.2 C33.2 C34.2 C35.2 C36.1 C39.2 C_EMERGENCY.MINUS C_QUA_1.1 C_QUA_2.2 C_QUA_4.1 C_QUA_5.1 C_QUA_8.2 C_QUA_9.2 CP1.NEG CP2.NEG CP3.NEG CP4.NEG D1.1 D2.1 D3.1 D4.2 D5.2 D6.1 D8.1 D10.1 D13.1 D18.1 D20.1 D21.1 D22.1 D_GPS_FIX.2 D_L0.2 D_L1.2 D_L2.2 D_P_MCCOI.1 D_PWR_LED.2 GPS.GND GPS.GND2 GPS.GND_3 GPS.GND_4 GPS.GND_5 GPS_BAT.GND GPS_C1.1 GPS_C2.2 GPS_C3.1 GPS_C4.1 GPS_C5.1 IC1.7 IC2.4 IC3.4 IC3.5 IC3.7 IC3.8 IC3.14 IC3.17 IC3.20 IC4.11 IC4.32 IC4.52 IC4.62 IC4.81 IC4.99 JP1.1 JP2.1 NHD_2.7.GND0 NHD_2.7.GND1 NHD_2.7.GND2 NHD_2.7.GND3 NHD_2.7.GND4 NHD_2.7.GND5 NHD_2.7.GND6 NHD_2.7.GND7 NHD_2.7.GND8 NHD_2.7.GND9 PE.1 PWR1.1 PWR.3 R13.1 R_B_LED_12.2 R_B_LED_13.2 R_B_LED_14.2 R_B_LED_15.2 R_B_LED_16.1 R_B_LED_17.1 R_B_LED_18.1 R_B_LED_19.1 R_B_LED_20.1 R_DEAKT_DAUER_P1.2 R_DZ_DOWN.2 R_E1_3.1 R_E2_2.2 R_FLASHL_DOWN.2 R_FLASHR_DOWN.2 R_HB_DOWN.2 R_R_LED_12.1 R_REED_DOWN.2 R_TX_DOWN.2 R_V_LOW.2 RX_L.1 S1.1 SPEEDOSTECKER.P$11 ST2.6 ST2.GND ST2.GND2 ST2.GND3 ST2.GND4 T1.2 T2.2 T3.2 T6.2 T7.2 T8.2 T9.2 T10.2 T11.2 T12.2 T13.2 TEMP_SENS.4 TEMP_SENS.5 TEMP_SENS.6 TEMP_SENS.7 U4.9 U5.2 U$1.3 U$1.5 U$1.21 U$14.10 U$14.19 U$19.10 U$19.15 U$19.16 U$19.17 U$23.2
GREEN_INSTR: R_G_LED_1.2 R_G_LED_2.2 R_G_LED_3.2 R_G_LED_4.2 R_G_LED_5.2 R_G_LED_6.2 R_G_LED_7.2 R_G_LED_8.2 R_G_LED_9.2 R_G_LED_10.2 R_G_LED_11.2 T2.3
HB_IN: C15.1 D8.3 IC4.87 R_HB.2 R_HB_DOWN.1
HB_IN_H: R_HB.1 SPEEDOSTECKER.P$1
KUPPLUNG_IN: D7.3 SPEEDOSTECKER.P$8
M1: U$1.23
M2: U$1.24
M3: U$1.25
M4: U$1.26
MISO_AT8: JP2.6 U$1.16
MOSI_AT8: JP2.3 U$1.15
N999: R_OIL_OV.1 R_OIL_UP.1 SPEEDOSTECKER.P$2
N$1: CP1.POS CP2.POS D11.3 L8.1 L10.2
N$3: AT8_REF.2 C1.1 U$1.18 U$1.20
N$4: C6.1 R_DELAY.1 TEMP_SENS.8
N$5: D5.1 R_CNT.1
N$6: R_B_LED_4.1 RGB_5.3-
N$7: R_G_LED_4.1 RGB_5.2-
N$8: R_R_LED_4.1 RGB_5.1-
N$9: D_PWR_LED.1 R_LED_5V.2
N$10: R_B_LED_5.1 RGB_6.3-
N$11: D15.A GPS_BAT.PWR@1
N$12: D4.1 R_DATA.1
N$13: Q11.3 RGB_11.1+ RGB_11.2+ RGB_11.3+
N$14: R_L2.1 U$1.11
N$15: D_GPS_FIX.1 R_GPS_LED.2
N$16: R_R_LED_0.1 U$22.P$4
N$17: R_GPS_LED.1 T5.3
N$18: R_L1.1 U$1.10
N$19: 5V_F.P$2 5V_SUPPLY.OUT C18.1
N$20: R_L0.1 U$1.9
N$21: R_G_LED_5.1 RGB_6.2-
N$22: R_R_LED_5.1 RGB_6.1-
N$23: Q10.3 RGB_10.1+ RGB_10.2+ RGB_10.3+
N$24: R_DEAKT_DAUER_P2.2 T_P_BRIDGE.1
N$25: R_OIL.1 U$11.P$4
N$26: Q9.3 RGB_1.1+ RGB_1.2+ RGB_1.3+
N$27: R_B_LED_6.1 RGB_7.3-
N$28: R_HIGHB.1 U$3.P$4
N$29: IC4.49
N$30: R_G_LED_6.1 RGB_7.2-
N$31: IC4.27
N$32: R_R_LED_6.1 RGB_7.1-
N$33: R_BL_L.2 T10.3
N$34: R_BL_R.2 T9.3
N$35: IC3.18 STEPPER.2-
N$36: IC3.16 STEPPER.2+
N$37: C31.1 IC4.98
N$38: IC1.9 R_E1_0.1 R_E1_1.2 R_E1_2.1 R_E1_3.2
N$39: R_HIGHB.2 T7.3
N$40: IC1.10 R_E1_4.1
N$41: D12.1 IC4.67
N$42: R_E2_4.1 R_HB3.1 SPEEDOSTECKER.P$13
N$43: R_E2_1.1 R_E2_3.2 SPEEDOSTECKER.P$16
N$44: IC4.53
N$45: D_VERPOL1.A T_P_BRIDGE.3
N$46: C17.2 R10.1
N$47: GPS_D1.3 GPS_D2.1
N$48: IC3.13 STEPPER.1+
N$49: IC4.65
N$50: IC4.12
N$51: R_R_LED_3.1 RGB_4.1-
N$52: R_G_LED_3.1 RGB_4.2-
N$53: R_B_LED_3.1 RGB_4.3-
N$54: R_R_LED_2.1 RGB_3.1-
N$55: R_G_LED_2.1 RGB_3.2-
N$56: R_B_LED_2.1 RGB_3.3-
N$57: R_R_LED_1.1 RGB_2.1-
N$58: R_G_LED_1.1 RGB_2.2-
N$59: R_B_LED_1.1 RGB_2.3-
N$60: IC4.13
N$61: IC4.14
N$62: R_BL_L.1 R_GR_BL_L.P$4
N$63: 16MHZ1.1 C_QUA_5.2 U$1.7
N$64: R_R_LED_7.1 RGB_11.1-
N$65: 16MHZ1.2 C_QUA_4.2 U$1.8
N$66: D_GR_BLR.P$4 R_BL_R.1
N$67: R_N.2 T6.3
N$68: R_OIL.2 T8.3
N$69: D_GR_N.P$4 R_N.1
N$70: R_HB1.1 SPEEDOSTECKER.P$3
N$71: R_R_LED_0.2 T11.3
N$72: R_G_LED_7.1 RGB_11.2-
N$73: R_B_LED_7.1 RGB_11.3-
N$74: R_R_LED_8.1 RGB_10.1-
N$75: R_G_LED_8.1 RGB_10.2-
N$76: R_B_LED_8.1 RGB_10.3-
N$77: R_R_LED_9.1 RGB_9.1-
N$78: R_G_LED_9.1 RGB_9.2-
N$79: R_B_LED_9.1 RGB_9.3-
N$80: R_R_LED_10.1 RGB_8.1-
N$81: R_G_LED_10.1 RGB_8.2-
N$82: R_B_LED_10.1 RGB_8.3-
N$83: R_R_LED_11.1 RGB_1.1-
N$84: R_G_LED_11.1 RGB_1.2-
N$85: R_B_LED_11.1 RGB_1.3-
N$86: Q8.3 RGB_8.1+ RGB_8.2+ RGB_8.3+
N$87: Q7.3 RGB_9.1+ RGB_9.2+ RGB_9.3+
N$88: Q1.3 RGB_7.1+ RGB_7.2+ RGB_7.3+
N$89: C23.2 R12.1
N$90: D18.3 R_E1_1.1 R_HB3.2
N$91: R_TEMP_OS.1 TEMP_SENS.3
N$92: R_HB4.1 SPEEDOSTECKER.P$7
N$93: Q2.3 RGB_6.1+ RGB_6.2+ RGB_6.3+
N$94: Q3.3 RGB_5.1+ RGB_5.2+ RGB_5.3+
N$95: Q4.3 RGB_4.1+ RGB_4.2+ RGB_4.3+
N$96: Q6.3 RGB_2.1+ RGB_2.2+ RGB_2.3+
N$97: Q5.3 RGB_3.1+ RGB_3.2+ RGB_3.3+
N$98: Q1.1 U$19.1
N$99: Q2.1 U$19.2
N$100: Q3.1 U$19.3
N$101: Q4.1 U$19.4
N$102: Q5.1 U$19.5
N$103: Q6.1 U$19.6
N$104: Q7.1 U$19.7
N$105: Q8.1 U$19.8
N$106: Q9.1 U$19.21
N$107: Q10.1 U$19.22
N$108: Q11.1 U$19.23
N$109: D11.1 R_R_LED_12.2
N$110: R_HB5.1 SPEEDOSTECKER.P$5
N$111: R_OIL_OV1.1 R_WATER_UP.2 SPEEDOSTECKER.P$12
N$112: R13.2 U5.8
N$114: IC3.15 STEPPER.1-
N$115: IC4.51
N$116: C_QUA_6.2 IC3.10
N$117: C_QUA_6.1 IC3.9
N$118: C_QUA_7.2 IC3.11
NET12: D14.1 R_DEAKT_DAUER_P2.1 R_DEAKT_DAUER_P.2 T13.3
NG_IN: C20.2 D10.3 IC4.88 R_HB5.2
OIL_PR_IN: C16.2 D21.3 IC4.89 R_HB1.2
P0: D_L0.1 R_L0.2
P1: D_L1.1 R_L1.2
P2: D_L2.1 R_L2.2
PE_A3: R_B_LED_17.2 T9.1 U$19.24
PE_A4: R_B_LED_19.2 T7.1 U$19.25
PE_A5: R_B_LED_20.2 T6.1 U$19.26
PE_A6: R_B_LED_16.2 T10.1 U$19.27
PE_A7: R_B_LED_18.2 T8.1 U$19.28
RED_INSTR: R_R_LED_1.2 R_R_LED_2.2 R_R_LED_3.2 R_R_LED_4.2 R_R_LED_5.2 R_R_LED_6.2 R_R_LED_7.2 R_R_LED_8.2 R_R_LED_9.2 R_R_LED_10.2 R_R_LED_11.2 T3.3 T12.3
REED: IC1.12 R_REED.2 R_REED_DOWN.1 R_REED_UP.2
REED_IN: R_REED.1 SPEEDOSTECKER.P$9
RESETAVR_AT8: C9.1 IC4.47 JP2.2 R_L3.2 U$1.29
RX0: IC4.2 RX.1
RX1: GPS.TXD IC4.45
RX3: IC4.63 U$1.31
SCK_AT8: JP2.4 U$1.17
SCL: IC3.2 IC4.43 R_SCL_UP.2 TEMP_SENS.2 TX2.3 U$19.12
SD_CD: ST2.2 U$14.11
SD_CLK: ST2.5 U$14.12
SD_DATA_IN: ST2.3 U$14.13
SDA: IC3.1 IC4.44 R_SDA_UP.2 TEMP_SENS.1 TX2.2 U$19.13
SELF_PWR_UP: IC4.35 R_DEAKT_DAUER_P1.1 T13.1
TO_DATA_LED: BLUETOOTH.P$11 R_DATA.2
TX: BLUETOOTH.P$27 RX.2
TX0: IC4.3 TX.2
TX1: IC4.46 R_TX_UP.2
TX1_3.3: GPS.RXD R_TX_DOWN.1 R_TX_UP.1
TX3: IC4.64 U$1.30
V_AT8_BUFFERED: AT8_REF.1 C2.2 C3.2 C_EMERGENCY.PLUS D9.C JP2.5 U$1.4 U$1.6
V_BAT: D15.C GPS.VBACKUP GPS_C2.1 GPS_D2.3 IC2.3
VDD: 5V_F.P$1 C14.2 C22.2 C32.1 C33.1 C34.1 C_QUA_1.2 C_QUA_2.1 D9.A D_GR_BLR.P$1 D_GR_BLR.P$2 D_GR_BLR.P$3 D_GR_N.P$1 D_GR_N.P$2 D_GR_N.P$3 IC1.1 IC1.8 IC1.13 IC1.14 IC2.8 IC3.3 IC4.10 IC4.31 IC4.61 IC4.80 IC4.100 JP1.5 PE.2 PWR1.2 PWR.2 Q1.2 Q2.2 Q3.2 Q4.2 Q5.2 Q6.2 Q7.2 Q8.2 Q9.2 Q10.2 Q11.2 R_DELAY.2 R_E1_0.2 R_GR_BL_L.P$1 R_GR_BL_L.P$2 R_GR_BL_L.P$3 R_L3.1 R_LED_5V.1 R_OIL_UP.2 R_REED_UP.1 R_RES_UP.2 R_SCL_UP.1 R_SDA_UP.1 R_TEMP_OS.2 R_WATER_UP.1 U4.18 U5.3 U$3.P$1 U$3.P$2 U$3.P$3 U$11.P$1 U$11.P$2 U$11.P$3 U$19.9 U$19.18 U$22.P$1 U$22.P$2 U$22.P$3 U$23.4